# Altium PCB Fingerprint_Mechanism_PCB_V0.3.PcbDoc
Units mil, origin at the board's own origin, x right, y up, seen from the top; angles counter-clockwise.
Board outline 1500 x 4000 mil, 2 copper layers (Top Layer, Bottom Layer); 6 components, 20 nets, 74 pads, 0 vias.
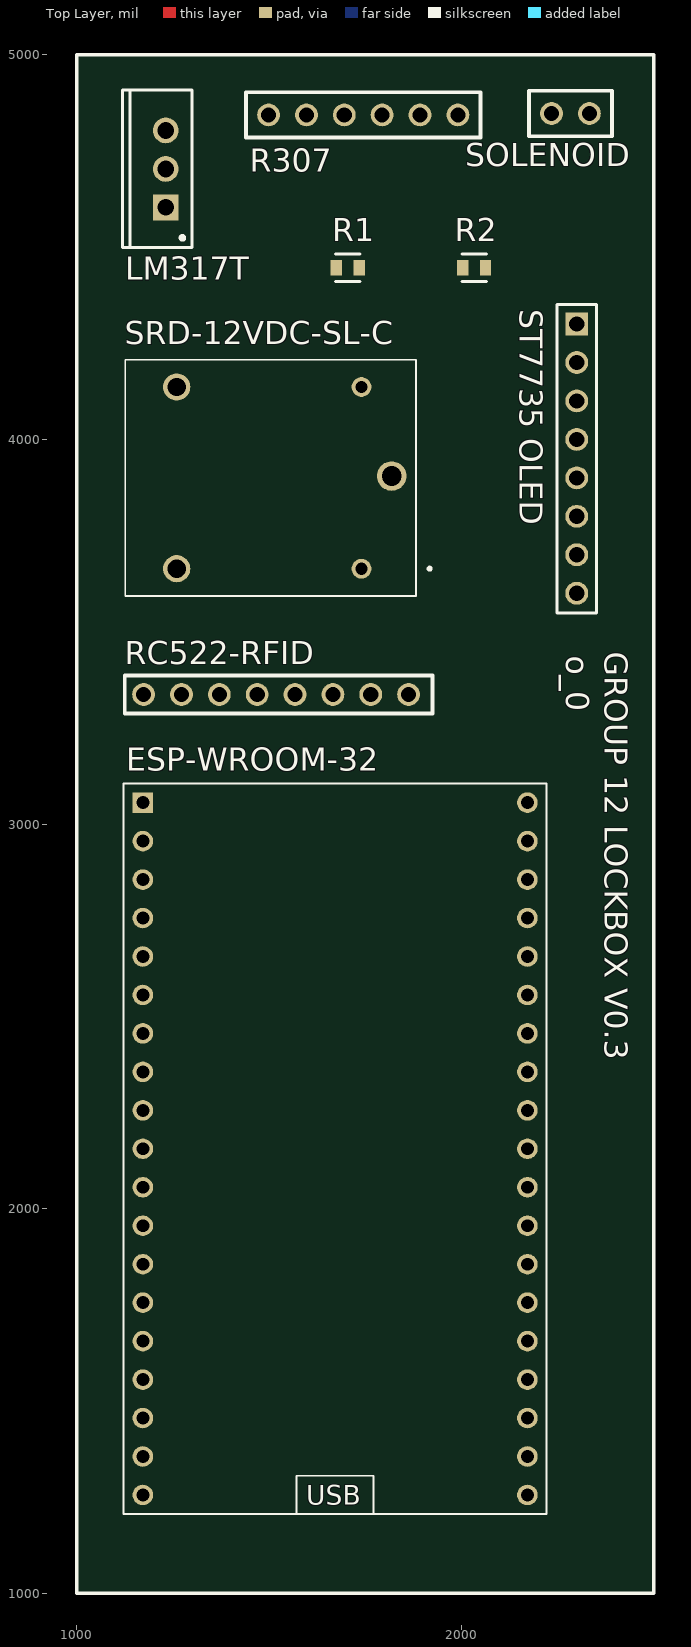
[diagram p0: Top Layer view]
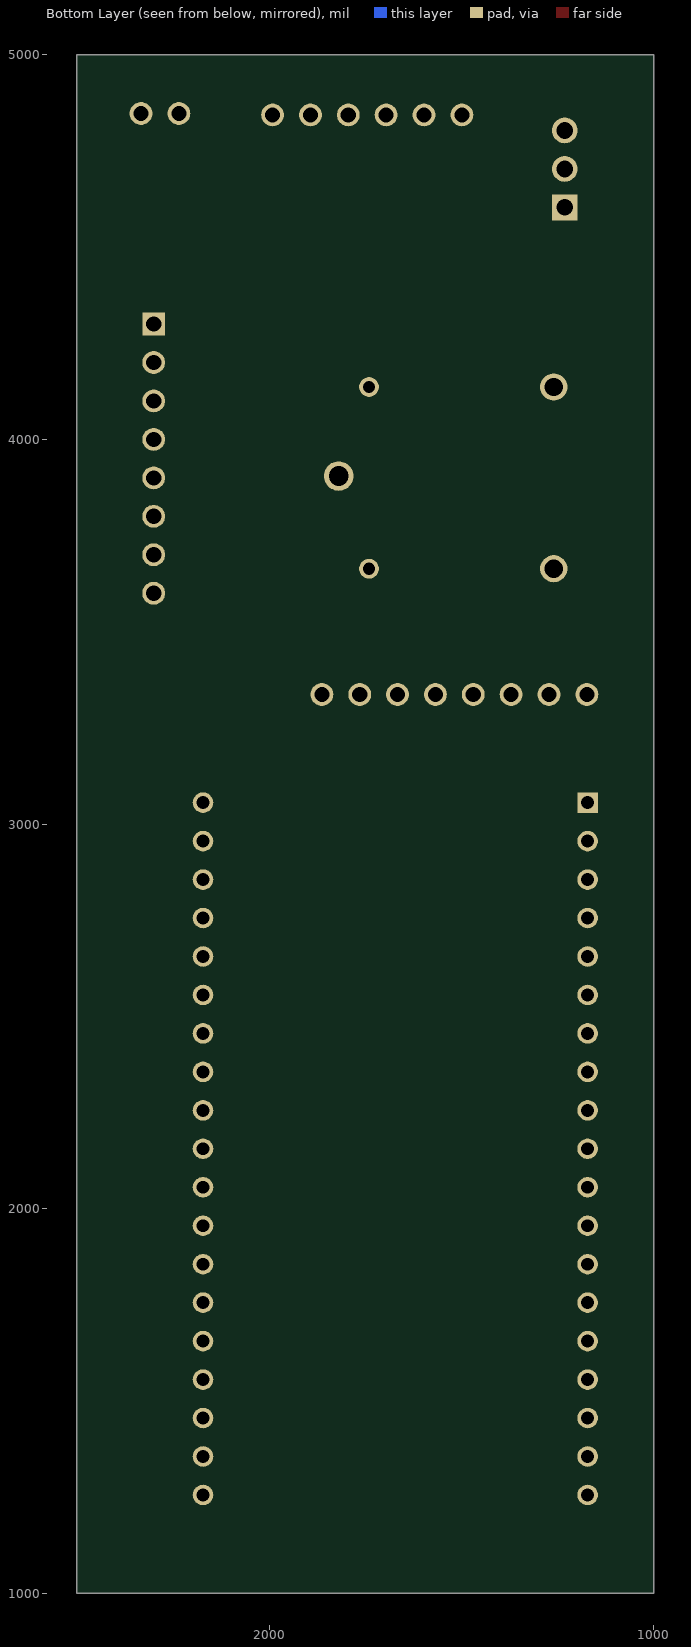
[diagram p1: Bottom Layer view, seen from below]

## Layer stack, top to bottom
Top Solder: solder mask 0.4, Solder Resist, Dk 3.5
Top Layer: signal copper 1.4
Dielectric 1: dielectric 12.6, FR-4, Dk 4.8
Bottom Layer: signal copper 1.4
Bottom Solder: solder mask 0.4, Solder Resist, Dk 3.5

## Board outline
1000,1000 1000,5000 2500,5000 2500,1000

## Design rules (kind name [scope] priority, off if disabled: settings)
Clearance [All] p1: gap=10 ignorepadtopadclearanceinfootprint=FALSE
PolygonConnect [All] p1: connectstyle=Relief reliefconductorwidth=10 reliefentries=4 polygonreliefangle="90 Angle" airgapwidth=10
RoutingVias [All] p1: holewidth=28 width=50 viastyle="Through Hole" minholewidth=28 minwidth=50 maxholewidth=28 maxwidth=50
SolderMaskExpansion [All] p1: expansion=4 istentingtop=FALSE
SupplyNets "Schematic Supply Nets_1" [InNet('GND')] p1: voltage=0.000
SupplyNets "Schematic Supply Nets" [InNet('24V VCC')] p2: voltage=0.000
Width [All] p1: maxlimit=10 minlimit=10 preferedwidth=10
30 further rules are at their usual default settings.

## Components (designator, comment, footprint, x,y, rotation, side; value= is the part's Value field where it differs from the comment)
ESP-WROOM-32 "Comment" ESP32-DEVKITC 1671.75,2155.5 r0 top
LM317T "LM317T Voltage Regulator (5V)" TO-220 1231.3,4703.15 r90 top (schematic designator C5)
R1 "Comment" FP-CRCW0603-e3-MFG 1704.51,4446.17 r0 top
R2 "Comment" FP-CRCW0603-e3-MFG 2033.32,4446.17 r0 top
SRD-12VDC-SL-C "Comment" RELAY_SRD-12VDC-SL-C 1500,3900 r180 top
"ST7735 OLED" "Comment" RFID-RC522 2300,3950 r270 top

## Footprints (in the part's own frame and the unit in brackets; to place one, negate y for a bottom-side part, rotate by r counter-clockwise, add the part's x,y. Pads: shape width x height; smd on the part's side, far side on the other; paste and mask are expansions set on the pad)
ESP32-DEVKITC [mm]
  rect 1.358x1.358 / inner round 1.358 / far side rect 1.358x1.358 hole 0.85: 1(-12.7,22.86)
  round 1.358 hole 0.85: 2(-12.7,20.32) 3(-12.7,17.78) 4(-12.7,15.24) 5(-12.7,12.7) 6(-12.7,10.16) 7(-12.7,7.62) 8(-12.7,5.08) 9(-12.7,2.54) 10(-12.7,0) 11(-12.7,-2.54) 12(-12.7,-5.08) 13(-12.7,-7.62) 14(-12.7,-10.16) 15(-12.7,-12.7) 16(-12.7,-15.24) 17(-12.7,-17.78) 18(-12.7,-20.32) 19(-12.7,-22.86) 20(12.7,-22.86) 21(12.7,-20.32) 22(12.7,-17.78) 23(12.7,-15.24) 24(12.7,-12.7) 25(12.7,-10.16) 26(12.7,-7.62) 27(12.7,-5.08) 28(12.7,-2.54) 29(12.7,0) 30(12.7,2.54) 31(12.7,5.08) 32(12.7,7.62) 33(12.7,10.16) 34(12.7,12.7) 35(12.7,15.24) 36(12.7,17.78) 37(12.7,20.32) 38(12.7,22.86)
  silkscreen extent -13.97,-24.13 13.97,24.13
FP-CRCW0603-e3-MFG [mm]
  rect 0.75x1 smd paste+0 mask+0: 1(-0.75,0) 2(0.75,0)
  silkscreen extent -0.8,-0.9 0.8,0.9, body extent -1.22,-0.6 1.22,0.6, height 0.25
RELAY_SRD-12VDC-SL-C [mm]
  round 1.308 hole 0.8: COIL1(-6.1,6) COIL2(-6.1,-6)
  round 1.95 hole 1.3: COM(-8.1,-0.12)
  round 1.8 hole 1.2: NC(6.1,6) NO(6.1,-6)
  silkscreen extent -10.7,-7.8 9.5,7.8
RFID-RC522 [mm]
  rect 1.508x1.508 / inner round 1.508 / far side rect 1.508x1.508 hole 1: 1(-8.89,0)
  round 1.508 hole 1: 2(-6.35,0) 3(-3.81,0) 4(-1.27,0) 5(1.27,0) 6(3.81,0) 7(6.35,0) 8(8.89,0)
  silkscreen extent -10.19,-1.3 10.19,1.3
TO-220 [mm] "TO, Thru-Hole, Vertical, Heatsink Mounted; 3 In-Line Leads; Pitch 2.54 mm"
  rect 1.7x1.7 hole 1.1: 1(-2.54,0)
  round 1.7 hole 1.1: 2(0,0) 3(2.54,0)
  silkscreen extent -5.2,-1.75 5.2,2.85, body extent -5.25,-1.8 5.25,2.9, height 19.7

## Part data
LM317T: library part CMP-0244-00444-1, "1.5A, 1.2V to 37V Adjustable Voltage Regulator, 3-Pin TO-220", ComponentLink1Description="Manufacturer URL", ComponentLink1URL=http://www.st.com, ComponentLink2Description=Datasheet, ComponentLink2URL=http://www.st.com/internet/com/TECHNICAL_RESOURCES/TECHNICAL_LITERATURE/DATASHEET/CD00000455.pdf, ComponentLink3Description="Package Specification", ComponentLink3URL=http://www.st.com/internet/com/TECHNICAL_RESOURCES/TECHNICAL_LITERATURE/PACKAGE_INFORMATION/CD00004649.pdf, DatasheetVersion=1/11/2011, PackageDescription="TO, Thru-Hole, Vertical, Heatsink Mounted; 3 In-Line Leads; Pitch 2.54 mm", PackageReference=TO-220, PackageVersion=2011

## Free pads (board coordinates)
  round 59.37 hole 39.37: ""(1173.79,3336.84) ""(1272.22,3336.84) ""(1370.64,3336.84) ""(1469.07,3336.84) ""(1498.72,4843.65) ""(1567.49,3336.84) ""(1597.15,4843.65) ""(1665.92,3336.84) ""(1695.57,4843.65) ""(1764.34,3336.84) ""(1794,4843.65) ""(1862.77,3336.84) ""(1892.42,4843.65) ""(1990.85,4843.65) ""(2234.45,4847.24) ""(2332.87,4847.24)

## Nets (pads, with @x,y where several pads share a name; then routed paths per layer and width w, separated by ;. In a path a pad name is that pad's centre, name@x,y a point inside that pad or via, vN(x,y) a via of type N, cw(c..) or ccw(c..) an arc to the next point about the centre after c; other vN are vias at no path point)
"24V VCC": 
GND: 
NetC0_2: 
NetC0_13: 
NetC0_23: 
NetC0_24: 
NetC0_26: 
NetC0_29: 
NetC0_30: 
NetC0_31: 
NetC0_33: 
NetC0_34: 
NetC0_35: 
NetC0_37: 
NetC2_3: LM317T.2
NetC4_1: 
NetC4_2: 
NetC4_3: 
NetC5_1: LM317T.1
NetC5_3: LM317T.3
pads on no net: "ST7735 OLED.1" "ST7735 OLED.2" "ST7735 OLED.3" "ST7735 OLED.4" "ST7735 OLED.5" "ST7735 OLED.6" "ST7735 OLED.7" "ST7735 OLED.8" ESP-WROOM-32.1 ESP-WROOM-32.2 ESP-WROOM-32.3 ESP-WROOM-32.4 ESP-WROOM-32.5 ESP-WROOM-32.6 ESP-WROOM-32.7 ESP-WROOM-32.8 ESP-WROOM-32.9 ESP-WROOM-32.10 ESP-WROOM-32.11 ESP-WROOM-32.12 ESP-WROOM-32.13 ESP-WROOM-32.14 ESP-WROOM-32.15 ESP-WROOM-32.16 ESP-WROOM-32.17 ESP-WROOM-32.18 ESP-WROOM-32.19 ESP-WROOM-32.20 ESP-WROOM-32.21 ESP-WROOM-32.22 ESP-WROOM-32.23 ESP-WROOM-32.24 ESP-WROOM-32.25 ESP-WROOM-32.26 ESP-WROOM-32.27 ESP-WROOM-32.28 ESP-WROOM-32.29 ESP-WROOM-32.30 ESP-WROOM-32.31 ESP-WROOM-32.32 ESP-WROOM-32.33 ESP-WROOM-32.34 ESP-WROOM-32.35 ESP-WROOM-32.36 ESP-WROOM-32.37 ESP-WROOM-32.38 R1.1 R1.2 R2.1 R2.2 SRD-12VDC-SL-C.COIL1 SRD-12VDC-SL-C.COIL2 SRD-12VDC-SL-C.COM SRD-12VDC-SL-C.NC SRD-12VDC-SL-C.NO

## Silkscreen, mask and mechanical layers (free items; w line width, h text height)
Top Overlay:
  lines w10: 1000,1000 1000,5000 2500,5000 2500,1000 1000,1000 ; 1124.58,3287.63 1924.54,3287.63 1924.54,3386.05 1124.58,3386.05 1124.58,3287.63 ; 1439.67,4784.6 2049.9,4784.6 2049.9,4902.71 1439.67,4902.71 1439.67,4784.6 ; 2175.39,4788.19 2391.93,4788.19 2391.93,4906.3 2175.39,4906.3 2175.39,4788.19
  text "SOLENOID" at 2010,4710 h60
  text "R307" at 1449.67,4696.17 h60
  text "GROUP 12 LOCKBOX V0.3" at 2372.16,3448.47 h60 r270
  text "o_0" at 2273.15,3436.85 h60 r270
  text "RC522-RFID" at 1124.73,3415.74 h60

## Text inside footprints (layer, text, board x,y; h text height)
ESP-WROOM-32: Top Overlay "USB" at 1596.75,1230.5 h50